# EAGLE board KMO_IO_MV2_9 (EAGLE 9.5.1), part 1 of 2
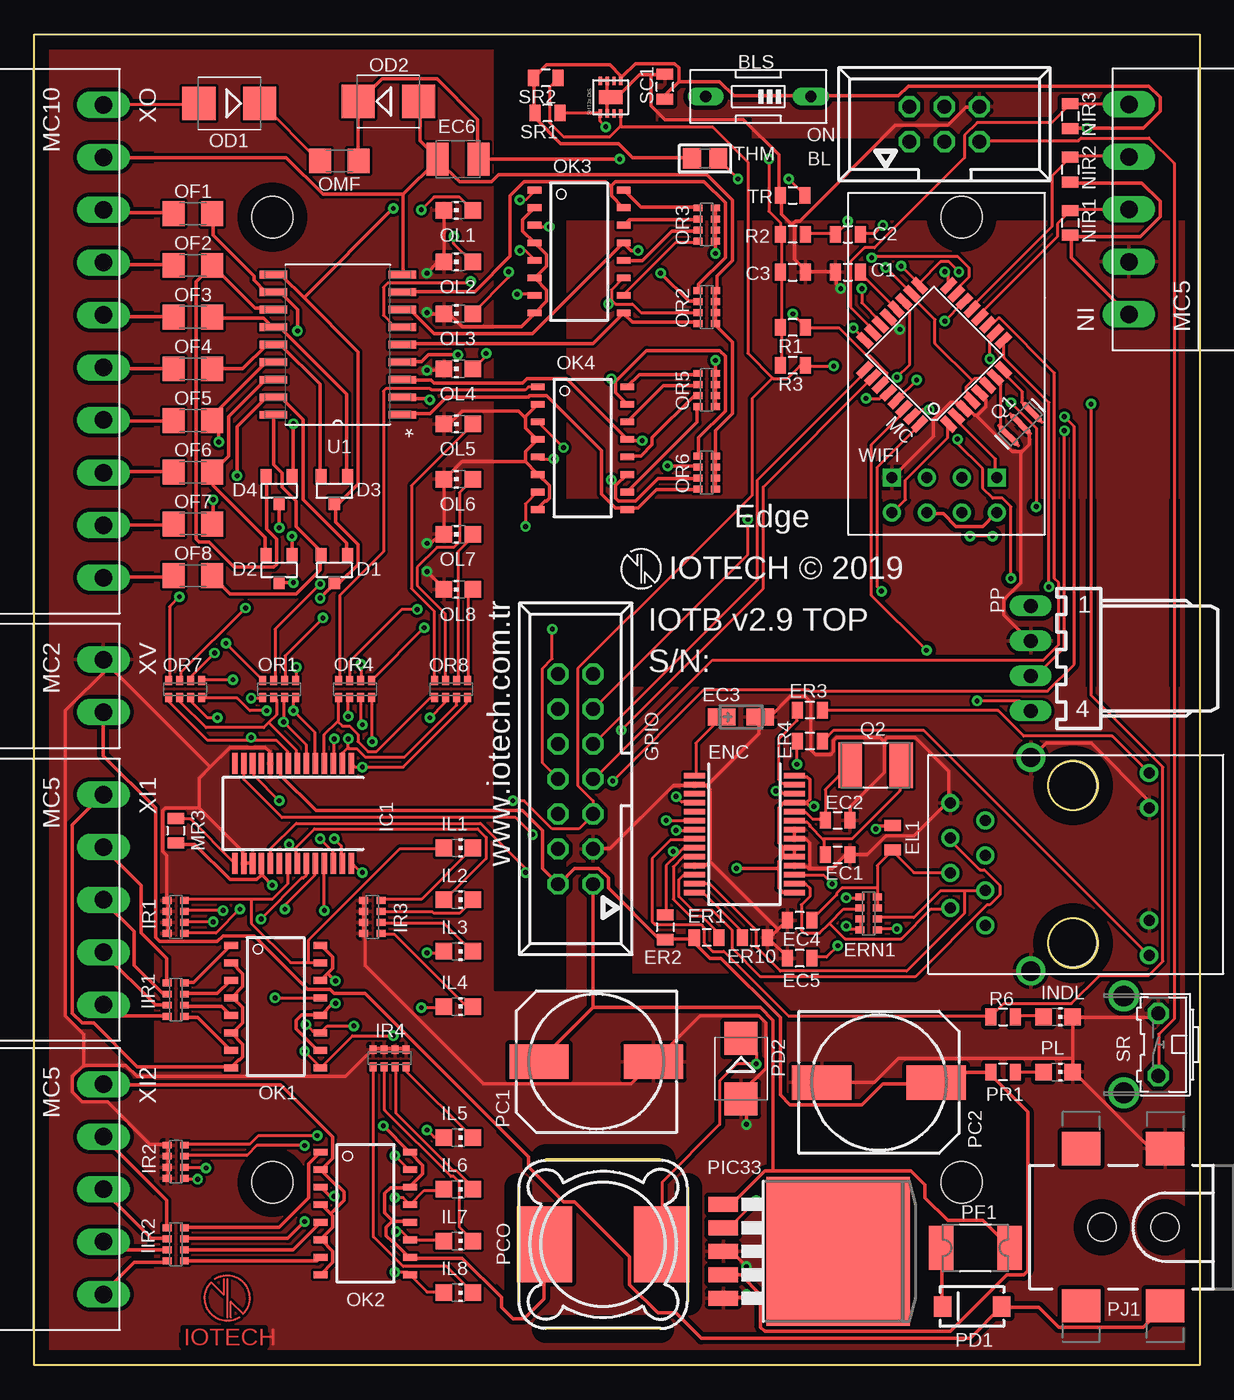
[diagram p0: board, top side]
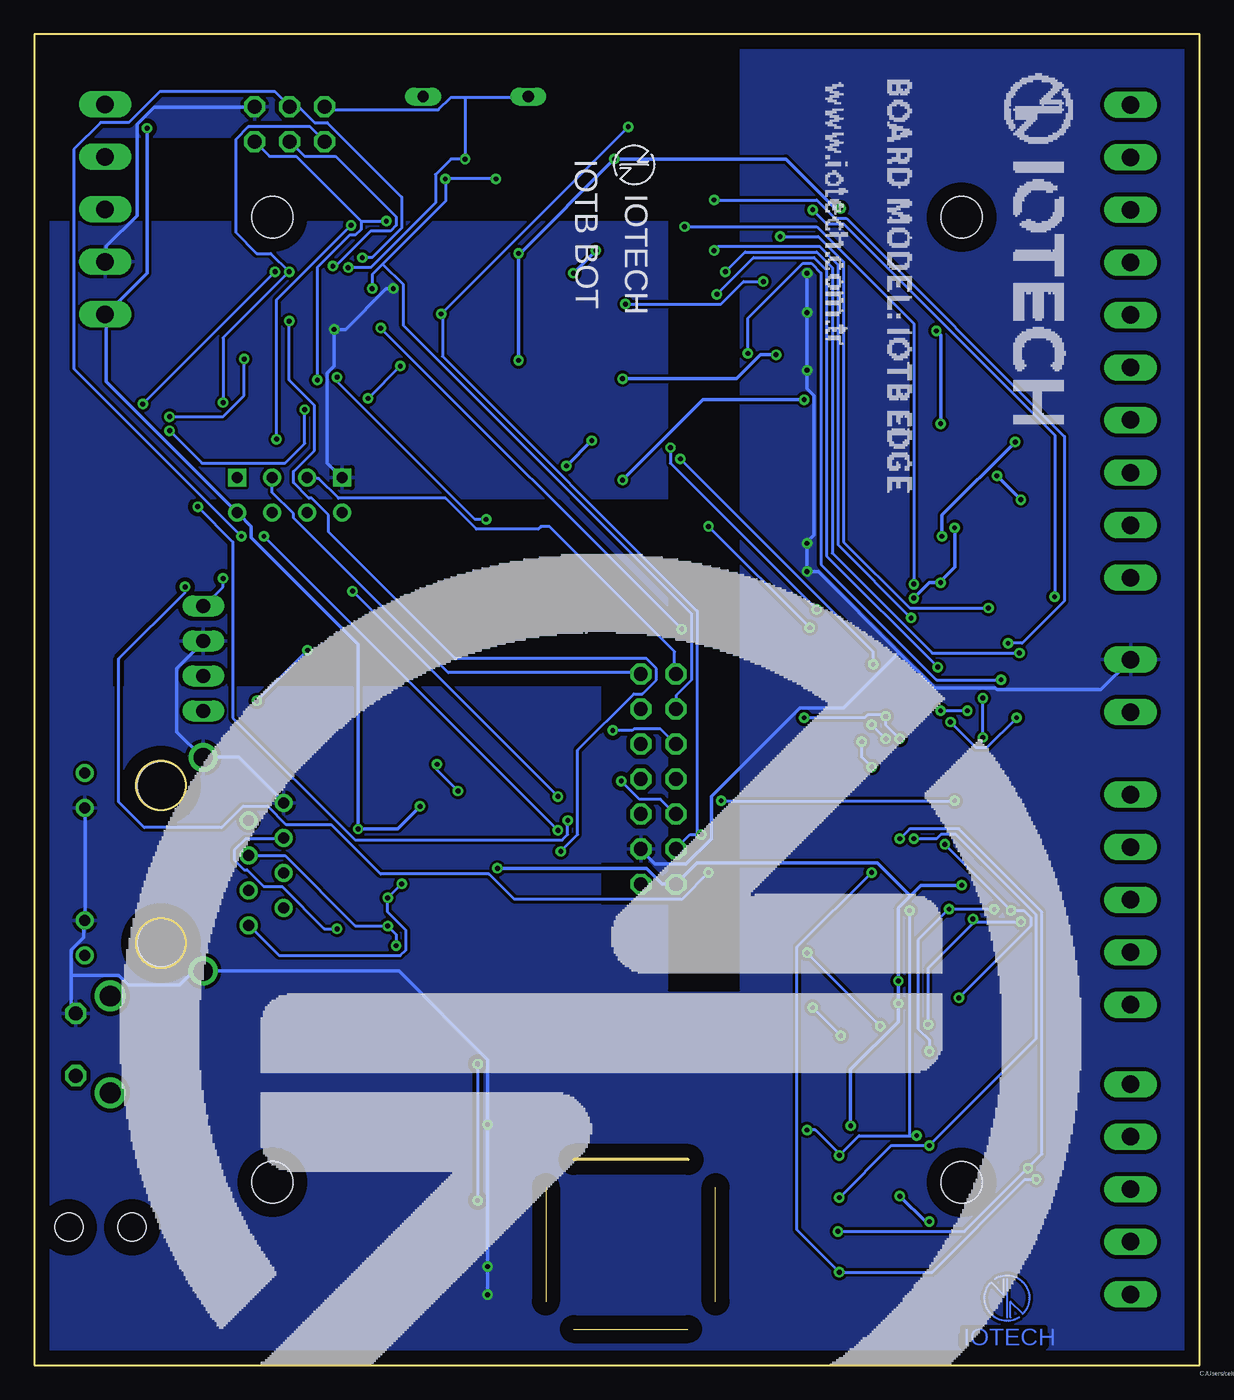
[diagram p1: board, bottom side, seen from below]

Size 84.5 x 96.5 mm. Coordinates in mm from the lower left corner, seen from the top.
Outline: 0,0 0,96.5 84.5,96.5 84.5,0 0,0
Copper layers (1*16): Top 0.035mm / dielectric 1.5mm / Bottom 0.035mm
Design rules "KMO_IO_M": minimum track width 6mil, minimum drill 0.35mm, track to track 0.205mm, track to pad 0.205mm, pad to pad 0.205mm, via to via 0.205mm, smd to smd 6mil, copper to edge 40mil, drill to drill 6mil, minimum pad ring 10mil, minimum via ring 8mil, stop-mask expansion 4mil, vias tented up to drill 0mil, thermal gap 10mil
Net classes: 0 default: width 0.203 mm, drill 0.3 mm, clearance 0.16 mm; 1 COM1: width 0.254 mm, drill 0.3 mm, clearance 0.16 mm to class 0, clearance 0.16 mm; 2 3.3V: width 0.254 mm, drill 0.3 mm, clearance 0.16 mm to class 0, clearance 0.16 mm to class 1, clearance 0.16 mm; 3 MAX_24V: width 0.254 mm, drill 0.3 mm, clearance 0.16 mm to class 0, clearance 0.16 mm to class 1, clearance 0.16 mm to class 2, clearance 0.16 mm; 4 RAW: width 0.254 mm, drill 0.3 mm, clearance 0.16 mm to class 0, clearance 0.16 mm to class 1, clearance 0.16 mm to class 2, clearance 0.16 mm to class 3, clearance 0.16 mm; 5 COM2: width 0.254 mm, drill 0.3 mm, clearance 0.16 mm to class 0, clearance 0.16 mm to class 1, clearance 0.16 mm to class 2, clearance 0.16 mm to class 3, clearance 0.16 mm to class 4, clearance 0.16 mm
Holes 3 mm at 17.25,83.25 67.25,83.25 17.25,13.25 67.25,13.25

## Footprints (pad centres in the part's own frame; a part is rotated, then mirrored left to right if it is on the bottom)
057-006-1 = drill 1 octagon: 1 -2.54,-1.27; 2 -2.54,1.27; 3 0,-1.27; 4 0,1.27; 5 2.54,-1.27; 6 2.54,1.27
EDG-01 = drill 0.813 long: 1 0,-3.81; 2 0,3.81
0805 = smd 0.8 x 1.2: 1 -0.9,0; 2 0.9,0
SOT-23-3 = smd 0.802 x 0.972: 1 -0.95,-1; 2 0.95,-1; 3 0,1
CT3216 = smd 2 x 1.2: + -1.4,0; - 1.4,0
SMC_B = smd 1.6 x 2.4: + -1.5,0; - 1.5,0
SSOP28 = smd 0.4 x 1.5: 1 -4.225,-3.625; 2 -3.575,-3.625; 3 -2.925,-3.625; 4 -2.275,-3.625; 5 -1.625,-3.625; 6 -0.975,-3.625; 7 -0.325,-3.625; 8 0.325,-3.625; 9 0.975,-3.625; 10 1.625,-3.625; 11 2.275,-3.625; 12 2.925,-3.625; 13 3.575,-3.625; 14 4.225,-3.625; 15 4.225,3.625; 16 3.575,3.625; 17 2.925,3.625; 18 2.275,3.625; 19 1.625,3.625; 20 0.975,3.625; 21 0.325,3.625; 22 -0.325,3.625; 23 -0.975,3.625; 24 -1.625,3.625; 25 -2.275,3.625; 26 -2.925,3.625; 27 -3.575,3.625; 28 -4.225,3.625
0603-ARV = smd 0.5 x 0.65: 1 -1.2,-0.625; 2 -0.4,-0.625; 3 0.4,-0.625; 4 1.2,-0.625; 5 1.2,0.625; 6 0.4,0.625; 7 -0.4,0.625; 8 -1.2,0.625
057-014-1 = drill 1 octagon: 1 -7.62,-1.27; 2 -7.62,1.27; 3 -5.08,-1.27; 4 -5.08,1.27; 5 -2.54,-1.27; 6 -2.54,1.27; 7 0,-1.27; 8 0,1.27; 9 2.54,-1.27; 10 2.54,1.27; 11 5.08,-1.27; 12 5.08,1.27; 13 7.62,-1.27; 14 7.62,1.27
CHIP-LED0805 = smd 1.2 x 1.2: A 0,-1.05; C 0,1.05
TQFP32-08 = smd 1.27 x 0.559: 1 -4.293,2.8; 2 -4.293,2; 3 -4.293,1.2; 4 -4.293,0.4; 5 -4.293,-0.4; 6 -4.293,-1.2; 7 -4.293,-2; 8 -4.293,-2.8; 17 4.293,-2.8; 18 4.293,-2; 19 4.293,-1.2; 20 4.293,-0.4; 21 4.293,0.4; 22 4.293,1.2; 23 4.293,2; 24 4.293,2.8 | smd 0.559 x 1.27: 9 -2.8,-4.293; 10 -2,-4.293; 11 -1.2,-4.293; 12 -0.4,-4.293; 13 0.4,-4.293; 14 1.2,-4.293; 15 2,-4.293; 16 2.8,-4.293; 25 2.8,4.293; 26 2,4.293; 27 1.2,4.293; 28 0.4,4.293; 29 -0.4,4.293; 30 -1.2,4.293; 31 -2,4.293; 32 -2.8,4.293
MC5 = drill 1.27 long: 1 -7.62,0; 2 -3.81,0; 3 0,0; 4 3.81,0; 5 7.62,0
SMB = smd 2.4 x 2.4: A 2.2,0; C -2.2,0
1206 = smd 1.6 x 1.8: 1 -1.4,0; 2 1.4,0
MINI-FLAT-16 = smd 1 x 0.5: 1 -3.24,4.445; 2 -3.24,3.175; 3 -3.24,1.905; 4 -3.24,0.635; 5 -3.24,-0.635; 6 -3.24,-1.905; 7 -3.24,-3.175; 8 -3.24,-4.445; 9 3.24,-4.445; 10 3.24,-3.175; 11 3.24,-1.905; 12 3.24,-0.635; 13 3.24,0.635; 14 3.24,1.905; 15 3.24,3.175; 16 3.24,4.445
140CLH-1010 = smd 4.3 x 2.5: + 4.15,0; - -4.15,0
MSS1260 = smd 5.5 x 4: P$1 0,4.25; P$2 0,-4.25
SMA-DIODE = smd 1.27 x 1.47: A -2.15,0; C 2.15,0
1820 = smd 1.78 x 3.2: 1 -2.49,0; 2 2.49,0
TO263-5 = smd 1.067 x 2.159: 1 -3.404,-5.791; 2 -1.702,-5.791; 3 0,-5.791; 4 1.702,-5.791; 5 3.404,-5.791 | smd 10.8 x 10.41: 6 0,2.54
POWER_JACK_SMD_OVERPASTE_TOE = smd 2.8 x 2.4: GND 0,-5.7; P$4 6.1,-5.7; VIN0 0,5.7; VIN1 6.1,5.7 | hole 2.032: 0,0; 4.572,0
7395-04 = drill 1.016 long: 1 3.81,0; 2 1.27,0; 3 -1.27,0; 4 -3.81,0
RESONATOR-SMD-1:1 = smd 0.45 x 1.905: 1 -1.2,0; 2 0,0; 3 1.2,0
5.0X3.2_2 = smd 1.7 x 3.3: 1 -1.85,0; 2 1.85,0
SHT3X = smd 0.55 x 0.25: ADDR -1.175,0.25; ALERT -1.175,-0.25; GND 1.175,0.75; R 1.175,0.25; RESET 1.175,-0.25; SCL -1.175,-0.75; SDA -1.175,0.75; VDD 1.175,-0.75 | smd 1 x 1.7: GND_PAD 0,-0.025
B3F-31XX = drill 1.016 octagon: 1 -2.261,-1.245; 2 2.261,-1.245 | drill 1.499 pad 2.159: 3 -3.505,1.245; 4 3.505,1.245
MICROBUILDER_0805_NOTHERMALS = smd 1.3 x 1.5: 1 -0.95,0; 2 0.95,0
SOIC127P1030X265-18N = smd 1.981 x 0.559: 1 -4.674,5.08; 2 -4.674,3.81; 3 -4.674,2.54; 4 -4.674,1.27; 5 -4.674,0; 6 -4.674,-1.27; 7 -4.674,-2.54; 8 -4.674,-3.81; 9 -4.674,-5.08; 10 4.674,-5.08; 11 4.674,-3.81; 12 4.674,-2.54; 13 4.674,-1.27; 14 4.674,0; 15 4.674,1.27; 16 4.674,2.54; 17 4.674,3.81; 18 4.674,5.08
RJ45 = drill 0.8: G+ 5.84,-6.305; G- 5.84,-3.765; GND -8.57,4.76; NC -6.03,3.5; P4 -8.57,-0.32; P5 -6.03,0.96; RD+ -6.03,-1.58; RD- -8.57,2.22; TD+ -6.03,-4.12; TD- -8.57,-2.86; Y+ 5.84,6.945; Y- 5.84,4.405 | drill 1.4: SHIELD1 -2.73,-7.425; SHIELD2 -2.73,8.065 | hole 3.5: 0.3,-5.38; 0.3,6.02
ESP01 = drill 0.8: CH_PD -1.285,-8.178; GPIO0 1.255,-5.638; GPIO2 -1.285,-5.638; RST 1.255,-8.178; TX -3.825,-8.178; VCC 3.795,-8.178 | drill 0.8 square: GND -3.825,-5.638; RX 3.795,-5.638
MC10 = drill 1.27 long: 1 -17.145,0; 2 -13.335,0; 3 -9.525,0; 4 -5.715,0; 5 -1.905,0; 6 1.905,0; 7 5.715,0; 8 9.525,0; 9 13.335,0; 10 17.145,0
MC2 = drill 1.27 long: 1 -1.905,0; 2 1.905,0

## Placement (x,y rotation side)
BL  057-006-1  [057-006-1]  66,90 0 top
BLS  ON  [EDG-01]  52.5,92 90 top
C1  100nF  [0805]  59,79.26 0 top
C2  100nF  [0805]  59,82.01 0 top
C3  100nF  [0805]  55,79.26 0 top
D1  BAV70  [SOT-23-3]  21.75,57.75 180 top
D2  BAV70  [SOT-23-3]  17.75,57.75 180 top
D3  BAV70  [SOT-23-3]  21.75,63.5 180 top
D4  BAV70  [SOT-23-3]  17.75,63.5 180 top
EC1  18p  [0805]  58.25,37 0 top
EC2  18p  [0805]  58.25,39.5 0 top
EC3  10u  [CT3216]  51.25,47 0 top
EC4  10n  [0805]  55.5,32.25 180 top
EC5  10n  [0805]  55.5,29.5 180 top
EC6  10u 25V B  [SMC_B]  30.73,87.45 180 top
EL1  10µH  [0805]  62.25,38.25 270 top
ENC  ENC28J60-SSOP  [SSOP28]  51.5,38.5 270 top
ER1  10k  [0805]  48.75,31 180 top
ER2  10k  [0805]  45.75,31.75 270 top
ER3  1k  [0805]  56.25,47.5 180 top
ER4  1k  [0805]  56.25,45.25 180 top
ER10  2.7K  [0805]  52.25,31 0 top
ERN1  49.9R  [0603-ARV]  60.5,32.75 270 top
GPIO  057-014-1  [057-014-1]  39.25,42.5 90 top
IC1  MCP23017SS  [SSOP28]  18.75,40 180 top
IIR1  6.8K  [0603-ARV]  10.25,26.5 270 top
IIR2  6.8K  [0603-ARV]  10.25,8.75 270 top
IL1  BLU  [CHIP-LED0805]  30.75,37.5 270 top
IL2  BLU  [CHIP-LED0805]  30.75,33.75 270 top
IL3  BLU  [CHIP-LED0805]  30.75,30 270 top
IL4  BLU  [CHIP-LED0805]  30.75,26 270 top
IL5  BLU  [CHIP-LED0805]  30.75,16.5 270 top
IL6  BLU  [CHIP-LED0805]  30.75,12.75 270 top
IL7  BLU  [CHIP-LED0805]  30.75,9 270 top
IL8  BLU  [CHIP-LED0805]  30.75,5.25 270 top
INDL  BLU  [CHIP-LED0805]  74.25,25.25 270 top
IR1  10K  [0603-ARV]  10.25,32.5 90 top
IR2  10K  [0603-ARV]  10.25,14.75 90 top
IR3  1K  [0603-ARV]  24.5,32.5 270 top
IR4  1K  [0603-ARV]  25.75,22.25 180 top
MC  ATMEGA328  [TQFP32-08]  65.25,73.26 135 top
MR3  10K  [0805]  10.25,38.75 270 top
NI  MC5  [MC5]  79.38,83.82 90 top
NIR1  4700  [0805]  75.12,82.84 270 top
NIR2  4700  [0805]  75.12,86.7 270 top
NIR3  4700  [0805]  75.12,90.56 270 top
OD1  SS54  [SMB]  14.13,91.5 180 top
OD2  28V  [SMB]  25.66,91.64 0 top
OF1  200mA  [1206]  11.5,83.5 0 top
OF2  200mA  [1206]  11.5,79.75 0 top
OF3  200mA  [1206]  11.5,76 0 top
OF4  200mA  [1206]  11.5,72.25 0 top
OF5  200mA  [1206]  11.5,68.5 0 top
OF6  200mA  [1206]  11.5,64.75 0 top
OF7  200mA  [1206]  11.5,61 0 top
OF8  200mA  [1206]  11.5,57.25 0 top
OK1  TLP283-4  [MINI-FLAT-16]  17.5,26 0 top
OK2  TLP283-4  [MINI-FLAT-16]  24,11 0 top
OK3  TLP283-4  [MINI-FLAT-16]  39.5,80.75 0 top
OK4  TLP283-4  [MINI-FLAT-16]  39.75,66.5 0 top
OL1  BLU  [CHIP-LED0805]  30.75,83.75 90 top
OL2  BLU  [CHIP-LED0805]  30.75,80 90 top
OL3  BLU  [CHIP-LED0805]  30.75,76.25 90 top
OL4  BLU  [CHIP-LED0805]  30.75,72.25 90 top
OL5  BLU  [CHIP-LED0805]  30.75,68.25 90 top
OL6  BLU  [CHIP-LED0805]  30.75,64.25 90 top
OL7  BLU  [CHIP-LED0805]  30.75,60.25 90 top
OL8  BLU  [CHIP-LED0805]  30.75,56.25 90 top
OMF  2A  [1206]  22.11,87.33 180 top
OR1  1K  [0603-ARV]  17.75,49.02 180 top
OR2  10K  [0603-ARV]  48.75,76.72 270 top
OR3  10K  [0603-ARV]  48.75,82.72 270 top
OR4  1K  [0603-ARV]  23.25,49.02 180 top
OR5  10K  [0603-ARV]  48.75,70.72 270 top
OR6  10K  [0603-ARV]  48.75,64.72 270 top
OR7  1K  [0603-ARV]  10.92,49.02 180 top
OR8  1K  [0603-ARV]  30.23,49.02 180 top
PC1  220uf 50v  [140CLH-1010]  40.75,22 180 top
PC2  220uf 50v  [140CLH-1010]  61.25,20.5 0 top
PCO  220 uh  [MSS1260]  41.25,8.75 90 top
PD1  M7  [SMA-DIODE]  68,4.25 180 top
PD2  SS54  [SMB]  51.25,21.5 270 top
PF1  1A  [1820]  68.25,8.5 0 top
PIC33  LM2596S-3.3  [TO263-5]  55.75,8.25 270 top
PJ1  POWER_JACKTOE  [POWER_JACK_SMD_OVERPASTE_TOE]  82,10 180 top
PL  GRN  [CHIP-LED0805]  74.25,21.25 270 top
PP  22-05-7048-04  [7395-04]  72.25,51.25 90 top
PR1  1k  [0805]  70.25,21.25 180 top
Q1  8MHz  [RESONATOR-SMD-1:1]  71.5,68.26 45 top
Q2  25MHz  [5.0X3.2_2]  61,43.5 0 top
R1  1.5K  [0805]  55,75.25 180 top
R2  10K  [0805]  55,82.01 180 top
R3  1.5K  [0805]  55,72.5 180 top
R6  1k  [0805]  70.25,25.25 0 top
SC1  100nF  [0805]  45.72,92.71 90 top
SHT  SHT3X  [SHT3X]  41.78,91.95 90 top
SR  gnd  [B3F-31XX]  80.25,23.25 90 top
SR1  10K  [0805]  37.21,90.81 180 top
SR2  10K  [0805]  37.08,93.34 180 top
THM  THERM  [MICROBUILDER_0805_NOTHERMALS]  48.64,87.5 0 top
TR  10K  [0805]  54.99,84.84 0 top
U1  ULN2803ADW  [SOIC127P1030X265-18N]  22,74 180 top
U$1  [IOTECH_COPPER_W_TEXT]  13.98,4.86 0 top
U$2  HR911105A  [RJ45]  75,36 0 top
U$4  [IOTECH_COPPER_W_TEXT]  13.97,4.86 0 bottom
WIFI  ESP01  [ESP01]  66,70 0 top
XI1  MC5  [MC5]  5,33.75 270 top
XI2  MC5  [MC5]  5,12.75 270 top
XO  MC10  [MC10]  5,74.25 270 top
XV  MC2  [MC2]  5,49.25 270 top

## Library data of the parts
BL GPIO = con-panduit; OC_FARNELL: unknown; OC_NEWARK: unknown
BLS = special
C1-C3 EC1 EC2 EC4 EC5 ER1-ER4 ER10 MR3 NIR1-NIR3 PR1 R1-R3 R6 SC1 SR1 SR2 TR = SparkFun-Passives
D1-D4 = BAV70; AVAILABILITY: Unavailable; DESCRIPTION: Diode, Dual Switching, Sot-23; MF: Multicomp; MP: BAV70+; PACKAGE: SOT-23 Multicomp; PRICE: None
EC3 EC6 PC1 PC2 = rcl; SPICEPREFIX: C
EL1 = SparkFun-Coils; PROD_ID: NDUC-13076
ENC = microchip-enc28j60
ERN1 IIR1 IIR2 IR1-IR4 OR1-OR8 = resistor-dil; OC_FARNELL: unknown; OC_NEWARK: unknown
IC1 = microchip; MF: MICROCHIP; MPN: MCP23017-E/SS; OC_FARNELL: 1467674; OC_NEWARK: 31K2960
IL1-IL8 INDL OL1-OL8 PL = led
MC = SparkFun
NI XI1 XI2 XO XV = con-phoenix-381_l
OD1 OD2 PD2 = diode
OF1-OF8 OMF = SparkFun-Fuses; PROD_ID: RES-11150
OK1 OK2 = optocoupler; OC_FARNELL: unknown; OC_NEWARK: unknown; SPICEPREFIX: O
OK3 OK4 = optocoupler; OC_FARNELL: unknown; OC_NEWARK: unknown
PCO = inductor-coilcraft
PD1 = SparkFun-DiscreteSemi
PF1 = _hhn_PtcFuses_Siba_r500_Ozan
PIC33 = national-semiconductor; MF: NATIONAL SEMICONDUCTOR; MPN: LM2596S-ADJ/NOPB; OC_FARNELL: 9494367; OC_NEWARK: 41K3842; SPICEPREFIX: X
PJ1 = SparkFun-Connectors; PROD_ID: CONN-08106; SF_ID: PRT-12748
PP = con-molex; MF: MOLEX; OC_FARNELL: unknown; OC_NEWARK: unknown
Q1 = Testing
Q2 = crystal-geyer_V1_0
SHT = sht3x-dis
SR = switch-omron; MPN: B3F-3100; OC_FARNELL: 959704; OC_NEWARK: 36M3582
THM = Adafruit Circuit Playground Express
U1 = ULN2803ADW; MPN: ULN2803ADW; OC_FARNELL: 1652419; OC_NEWARK: 69K0711; PACKAGE: SOIC-18; SUPPLIER: TEXAS INSTRUMENTS
U$1 U$4 = Logo
U$2 = HR911105A
WIFI = esp8266modules

## Nets
+3V3 [3.3V]: BLS.1 EL1.1 ENC.15 ENC.19 ENC.20 ENC.25 ENC.28 ER1.2 ER2.2 GPIO.2 IC1.9 IC1.18 MR3.2 NI.1 NIR1.2 NIR2.2 NIR3.2 OK1.10 OK1.12 OK1.14 OK1.16 OK2.10 OK2.12 OK2.14 OK2.16 PC2.+ PCO.P$1 PIC33.4 PR1.2 SC1.1 SHT.VDD SR1.2 SR2.2 THM.1 WIFI.CH_PD WIFI.VCC
A0: MC.23 NI.5 NIR3.1
A1: GPIO.8 MC.24
A2: GPIO.9 MC.25
A3: GPIO.10 MC.26
A4: GPIO.4 IC1.13 MC.27 R1.1 SHT.SDA SR1.1
A5: GPIO.5 IC1.12 MC.28 R3.1 SHT.SCL SR2.1
A6: GPIO.11 MC.19
A7: GPIO.12 MC.22 THM.2 TR.2
AREF: C1.2 MC.20
BLV: BL.2 BLS.2 C3.1 MC.4 MC.6 MC.18 R1.2 R2.2 R3.2
COM1 [COM1]: OK1.2 OK1.4 OK1.6 OK1.8 XI1.1
COM2 [COM2]: OK2.2 OK2.4 OK2.6 OK2.8 XI2.1
D2: ENC.4 MC.32
D3: MC.1 WIFI.TX
D4: MC.2 WIFI.RX
D5: IC1.19 MC.9
D6: GPIO.6 MC.10
D7: GPIO.7 MC.11
D8: MC.12 NI.3 NIR1.1
D9: MC.13 NI.4 NIR2.1
D10: ENC.9 ER2.1 MC.14
D11: BL.4 ENC.7 MC.15
D12: BL.1 ENC.6 MC.16
D13: BL.3 ENC.8 MC.17 R6.1
DTR: C2.2 PP.1
EP4: EC4.1 EL1.2 ERN1.7 ERN1.8 U$2.P4
EP5: EC5.1 ERN1.3 ERN1.4 U$2.P5
GND [3.3V]: BL.6 C1.1 C3.2 EC1.2 EC2.2 EC3.- EC4.2 EC5.2 ENC.2 ENC.11 ENC.18 ENC.21 ENC.22 ER10.2 GPIO.3 IC1.10 IC1.16 IC1.17 INDL.C IR1.5 IR1.6 IR1.7 IR1.8 IR2.5 IR2.6 IR2.7 IR2.8 IR3.1 IR3.2 IR3.3 IR3.4 IR4.1 IR4.2 IR4.3 IR4.4 MC.3 MC.5 MC.21 NI.2 OK3.2 OK3.4 OK3.6 OK3.8 OK4.2 OK4.4 OK4.6 OK4.8 OL1.C OL2.C OL3.C OL4.C OL5.C OL6.C OL7.C OL8.C PC1.- PC2.- PD2.A PIC33.3 PIC33.5 PJ1.GND PL.C PP.2 Q1.2 SC1.2 SHT.ADDR SHT.GND SHT.GND_PAD SHT.R SR.2 TR.1 U$2.G- U$2.GND U$2.SHIELD1 U$2.SHIELD2 U$2.Y- WIFI.GND XV.1
GNDO [MAX_24V]: EC6.- OD2.A OR2.5 OR2.6 OR2.7 OR2.8 OR6.5 OR6.6 OR6.7 OR6.8 U1.9 XO.2
GPA0: IC1.21 IL1.A IR1.4 OK1.15
GPA1: IC1.22 IL2.A IR1.3 OK1.13
GPA2: IC1.23 IL3.A IR1.2 OK1.11
GPA3: IC1.24 IL4.A IR1.1 OK1.9
GPA4: IC1.25 IL5.A IR2.4 OK2.15
GPA5: IC1.26 IL6.A IR2.3 OK2.13
GPA6: IC1.27 IL7.A IR2.2 OK2.11
GPA7: IC1.28 IL8.A IR2.1 OK2.9
GPB0: IC1.1 OR4.8 OR8.8
GPB1: IC1.2 OR4.7 OR8.7
GPB2: IC1.3 OR4.6 OR8.6
GPB3: IC1.4 OR4.5 OR8.5
GPB4: IC1.5 OR1.8 OR7.8
GPB5: IC1.6 OR1.7 OR7.7
GPB6: IC1.7 OR1.6 OR7.6
GPB7: IC1.8 OR1.5 OR7.5
IO5 [MAX_24V]: OK4.15 OR6.1 U1.4
IO6 [MAX_24V]: OK4.13 OR6.2 U1.3
IO7 [MAX_24V]: OK4.11 OR6.3 U1.2
IO8 [MAX_24V]: OK4.9 OR6.4 U1.1
LEDA: ER3.1 U$2.Y+
LEDB: ER4.1 U$2.G+
N$1: OD1.A XO.1
N$2 [RAW]: PD1.C PF1.1
N$3: IC1.15 MR3.1
N$4: OD1.C OMF.2
N$5: INDL.A R6.2
N$6 [MAX_24V]: OF8.1 XO.10
N$7 [MAX_24V]: D1.1 OF7.2 U1.17
N$8: OK3.1 OR1.4
N$9: ENC.27 ER3.2
N$10: MC.8 Q1.3
N$11: PL.A PR1.1
N$12: IL1.C IR3.8
N$13: EC3.+ ENC.1
N$14: ENC.26 ER4.2
N$15: MC.7 Q1.1
N$16: PCO.P$2 PD2.C PIC33.2
N$17: ENC.10 ER1.1
N$18 [COM1]: IIR1.1 XI1.2
N$19: ENC.14 ER10.1
N$20: IL2.C IR3.7
N$21: IL3.C IR3.6
N$22: EC2.1 ENC.24 Q2.1
N$23: IL4.C IR3.5
N$24: EC1.1 ENC.23 Q2.2
N$25: IL5.C IR4.8
N$26: IL6.C IR4.7
N$27: IL7.C IR4.6
N$28 [COM1]: IIR1.2 XI1.3
N$29 [COM1]: IIR1.8 OK1.1
N$30 [COM1]: IIR1.7 OK1.3
N$31 [COM1]: IIR1.6 OK1.5
N$32 [COM1]: IIR1.5 OK1.7
N$33 [COM1]: IIR1.3 XI1.4
N$34 [COM1]: IIR1.4 XI1.5
N$35: OK3.3 OR1.3
N$36 [COM2]: IIR2.1 XI2.2
N$37 [COM2]: IIR2.8 OK2.1
N$38 [COM2]: IIR2.2 XI2.3
N$39 [COM2]: IIR2.7 OK2.3
N$40 [COM2]: IIR2.3 XI2.4
N$41 [COM2]: IIR2.6 OK2.5
N$42 [COM2]: IIR2.4 XI2.5
N$43 [COM2]: IIR2.5 OK2.7
N$44: IL8.C IR4.5
N$45: OK3.5 OR1.2
N$46: OK3.7 OR1.1
N$47 [MAX_24V]: D1.2 OF8.2 U1.18
N$48 [MAX_24V]: OK3.16 OR3.1
N$49 [MAX_24V]: D2.2 OF6.2 U1.16
N$50 [MAX_24V]: D2.1 OF5.2 U1.15
N$51 [MAX_24V]: OF7.1 XO.9
N$52 [MAX_24V]: OF6.1 XO.8
N$53 [MAX_24V]: OK3.14 OR3.2
N$54 [MAX_24V]: OF5.1 XO.7
N$55 [MAX_24V]: OF4.1 XO.6
N$56 [MAX_24V]: OK3.12 OR3.3
N$57 [MAX_24V]: D3.1 OF3.2 U1.13
N$58: OK3.10 OR3.4
N$59 [MAX_24V]: D4.2 OF2.2 U1.12
N$60: OL1.A OR7.4
N$61: OL2.A OR7.3
N$62: OL3.A OR7.2
N$63: OL4.A OR7.1
N$64 [MAX_24V]: D4.1 OF1.2 U1.11
N$65 [MAX_24V]: D3.2 OF4.2 U1.14
N$66 [MAX_24V]: OF3.1 XO.5
N$67 [MAX_24V]: OF2.1 XO.4
N$68 [MAX_24V]: OF1.1 XO.3
N$69: OK4.1 OR4.4
N$70: OK4.3 OR4.3
N$71: OK4.5 OR4.2
N$72: OK4.7 OR4.1
N$73 [MAX_24V]: OK4.16 OR5.1
N$74 [MAX_24V]: OK4.14 OR5.2
N$75 [MAX_24V]: OK4.12 OR5.3
N$76 [MAX_24V]: OK4.10 OR5.4
N$77: OL5.A OR8.4
N$78: OL6.A OR8.3
N$79: OL7.A OR8.2
N$80: OL8.A OR8.1
OI1 [MAX_24V]: OK3.15 OR2.1 U1.8
OI2 [MAX_24V]: OK3.13 OR2.2 U1.7
OI3: OK3.11 OR2.3 U1.6
OI4 [MAX_24V]: OK3.9 OR2.4 U1.5
RAW_IV [RAW]: GPIO.1 PC1.+ PF1.2 PIC33.1
RD+: ENC.13 ERN1.6 U$2.RD+
RD-: ENC.12 ERN1.5 U$2.RD-
RESET: BL.5 C2.1 MC.29 R2.1 SR.1
RXI: MC.30 PP.4
TD+: ENC.17 ERN1.1 U$2.TD+
TD-: ENC.16 ERN1.2 U$2.TD-
TXO: MC.31 PP.3
VDDO [MAX_24V]: D1.3 D2.3 D3.3 D4.3 EC6.+ OD2.C OMF.1 OR3.5 OR3.6 OR3.7 OR3.8 OR5.5 OR5.6 OR5.7 OR5.8 U1.10
VIN [RAW]: PD1.A PJ1.VIN0 XV.2
WFGPIO0: GPIO.13 WIFI.GPIO0
WFGPIO2: GPIO.14 WIFI.GPIO2